# EAGLE board circuit (EAGLE 9.7.0)

Size 431.68 x 139.55 mm. Coordinates in mm from the lower left corner, seen from the top.
Outline: 0,0 431.68,0 431.68,139.55 0,139.55 0,0
Copper layers (1*16): Top 0.035mm / dielectric 1.5mm / Bottom 0.035mm
Design rules "default": minimum track width 6mil, minimum drill 0.35mm, track to track 6mil, track to pad 6mil, pad to pad 6mil, via to via 6mil, smd to smd 6mil, copper to edge 40mil, drill to drill 6mil, minimum pad ring 10mil, minimum via ring 8mil, stop-mask expansion 4mil, vias tented up to drill 0mil, thermal gap 10mil

## Footprints (pad centres in the part's own frame; a part is rotated, then mirrored left to right if it is on the bottom)
LEDRD254W60D565H860B_Y = drill 0.981 pad 1.581: 1 -1.27,0; 2 1.27,0
LEDRD254W60D565H860B_G = drill 0.981 pad 1.581: 1 -1.27,0; 2 1.27,0
RESAD1016W63L850D250B = drill 0.83 pad 1.43: 1 -5.08,0; 2 5.08,0
HA-06-SM065 = drill 1 pad 1.676: 1 -2.54,-2.54; 2 0,2.54; 3 2.54,-2.54
ARDUINO-UNO-R3-SHIELD = drill 1.016 pad 1.88: 3.3V 24.13,-2.54; 5V 24.13,0; A0 24.13,12.7; A1 24.13,15.24; A2 24.13,17.78; A3 24.13,20.32; A4 24.13,22.86; A5 24.13,25.4; AREF -24.13,-13.97; D2 -24.13,20.32; D3 -24.13,17.78; D4 -24.13,15.24; D5 -24.13,12.7; D6 -24.13,10.16; D7 -24.13,7.62; D8 -24.13,3.81; D9 -24.13,1.27; D10 -24.13,-1.27; D11 -24.13,-3.81; D12 -24.13,-6.35; D13 -24.13,-8.89; GND@0 24.13,2.54; GND@1 24.13,5.08; GND@2 -24.13,-11.43; IOREF 24.13,-7.62; NC 24.13,-10.16; RES 24.13,-5.08; RX -24.13,25.4; SCL -24.13,-19.05; SDA -24.13,-16.51; TX -24.13,22.86; VIN 24.13,7.62

## Placement (x,y rotation side)
D1  YELLOW  [LEDRD254W60D565H860B_Y]  7.6,113.51 180 top
D2  YELLOW  [LEDRD254W60D565H860B_Y]  15.22,113.51 180 top
D3  YELLOW  [LEDRD254W60D565H860B_Y]  22.84,113.51 180 top
D4  YELLOW  [LEDRD254W60D565H860B_Y]  30.46,113.51 180 top
D5  GREEN  [LEDRD254W60D565H860B_G]  45.7,113.51 180 top
D6  GREEN  [LEDRD254W60D565H860B_G]  53.32,113.51 180 top
D7  GREEN  [LEDRD254W60D565H860B_G]  60.94,113.51 180 top
D8  GREEN  [LEDRD254W60D565H860B_G]  68.56,113.51 180 top
R1  330  [RESAD1016W63L850D250B]  6.33,105.89 90 top
R2  330  [RESAD1016W63L850D250B]  13.95,105.89 90 top
R3  330  [RESAD1016W63L850D250B]  21.57,105.89 90 top
R4  330  [RESAD1016W63L850D250B]  29.19,105.89 90 top
R5  450  [RESAD1016W63L850D250B]  44.43,105.89 90 top
R6  450  [RESAD1016W63L850D250B]  52.05,105.89 90 top
R7  450  [RESAD1016W63L850D250B]  59.67,105.89 90 top
R8  450  [RESAD1016W63L850D250B]  67.29,105.89 90 top
RPOT1  250k  [HA-06-SM065]  423.16,132.01 0 top
RPOT2  250k  [HA-06-SM065]  424.63,132.5 0 top
RPOT6  10k  [HA-06-SM065]  148.57,98.27 0 top
UMAIN_BORD  ARDUINO-UNO-R3-SHIELD  [ARDUINO-UNO-R3-SHIELD]  80.15,29.84 270 top

## Library data of the parts
D1-D4 = Tinkercad; CATEGORY: Opto-Electronic; SUB-CATEGORY: LED; VALUE: LED_YELLOW
D5-D8 = Tinkercad; CATEGORY: Opto-Electronic; SUB-CATEGORY: LED; VALUE: LED_GREEN
R1-R8 RPOT1 RPOT2 RPOT6 UMAIN_BORD = Tinkercad

## Nets
D1_C: D1.2 R1.2
D2_C: D2.2 R2.2
D3_C: D3.2 R3.2
D4_C: D4.2 R4.2
D5_C: D5.2 R5.2
D6_C: D6.2 R6.2
D7_C: D7.2 R7.2
D8_C: D8.2 R8.2
UMAIN_BORD_5V: RPOT6.1 UMAIN_BORD.5V
UMAIN_BORD_A0: RPOT6.2 UMAIN_BORD.A0
UMAIN_BORD_D4: R8.1 UMAIN_BORD.D4
UMAIN_BORD_D5: R7.1 UMAIN_BORD.D5
UMAIN_BORD_D6: R6.1 UMAIN_BORD.D6
UMAIN_BORD_D7: R5.1 UMAIN_BORD.D7
UMAIN_BORD_D10: R4.1 UMAIN_BORD.D10
UMAIN_BORD_D11: R3.1 UMAIN_BORD.D11
UMAIN_BORD_D12: R2.1 UMAIN_BORD.D12
UMAIN_BORD_D13: R1.1 UMAIN_BORD.D13
UMAIN_BORD_GND: D1.1 D2.1 D3.1 D4.1 D5.1 D6.1 D7.1 D8.1 RPOT6.3 UMAIN_BORD.GND@0 UMAIN_BORD.GND@1 UMAIN_BORD.GND@2

## Tracks (layer width: path | path; a pad name or v marks a point on that pad's centre or on a via)
D1_C  (1 unrouted)
D2_C  (1 unrouted)
D3_C  (1 unrouted)
D4_C  (1 unrouted)
D5_C  (1 unrouted)
D6_C  (1 unrouted)
D7_C  (1 unrouted)
D8_C  (1 unrouted)
UMAIN_BORD_5V  (1 unrouted)
UMAIN_BORD_A0  (1 unrouted)
UMAIN_BORD_D4  (1 unrouted)
UMAIN_BORD_D5  (1 unrouted)
UMAIN_BORD_D6  (1 unrouted)
UMAIN_BORD_D7  (1 unrouted)
UMAIN_BORD_D10  (1 unrouted)
UMAIN_BORD_D11  (1 unrouted)
UMAIN_BORD_D12  (1 unrouted)
UMAIN_BORD_D13  (1 unrouted)
UMAIN_BORD_GND  (11 unrouted)